# Altium PCB main.PcbDoc
Units mm, origin at the board's own origin, x right, y up, seen from the top; angles counter-clockwise.
Board outline 57.39 x 57.39 mm, 2 copper layers (Top Layer, Bottom Layer); 78 components, 85 nets, 345 pads, 151 vias.
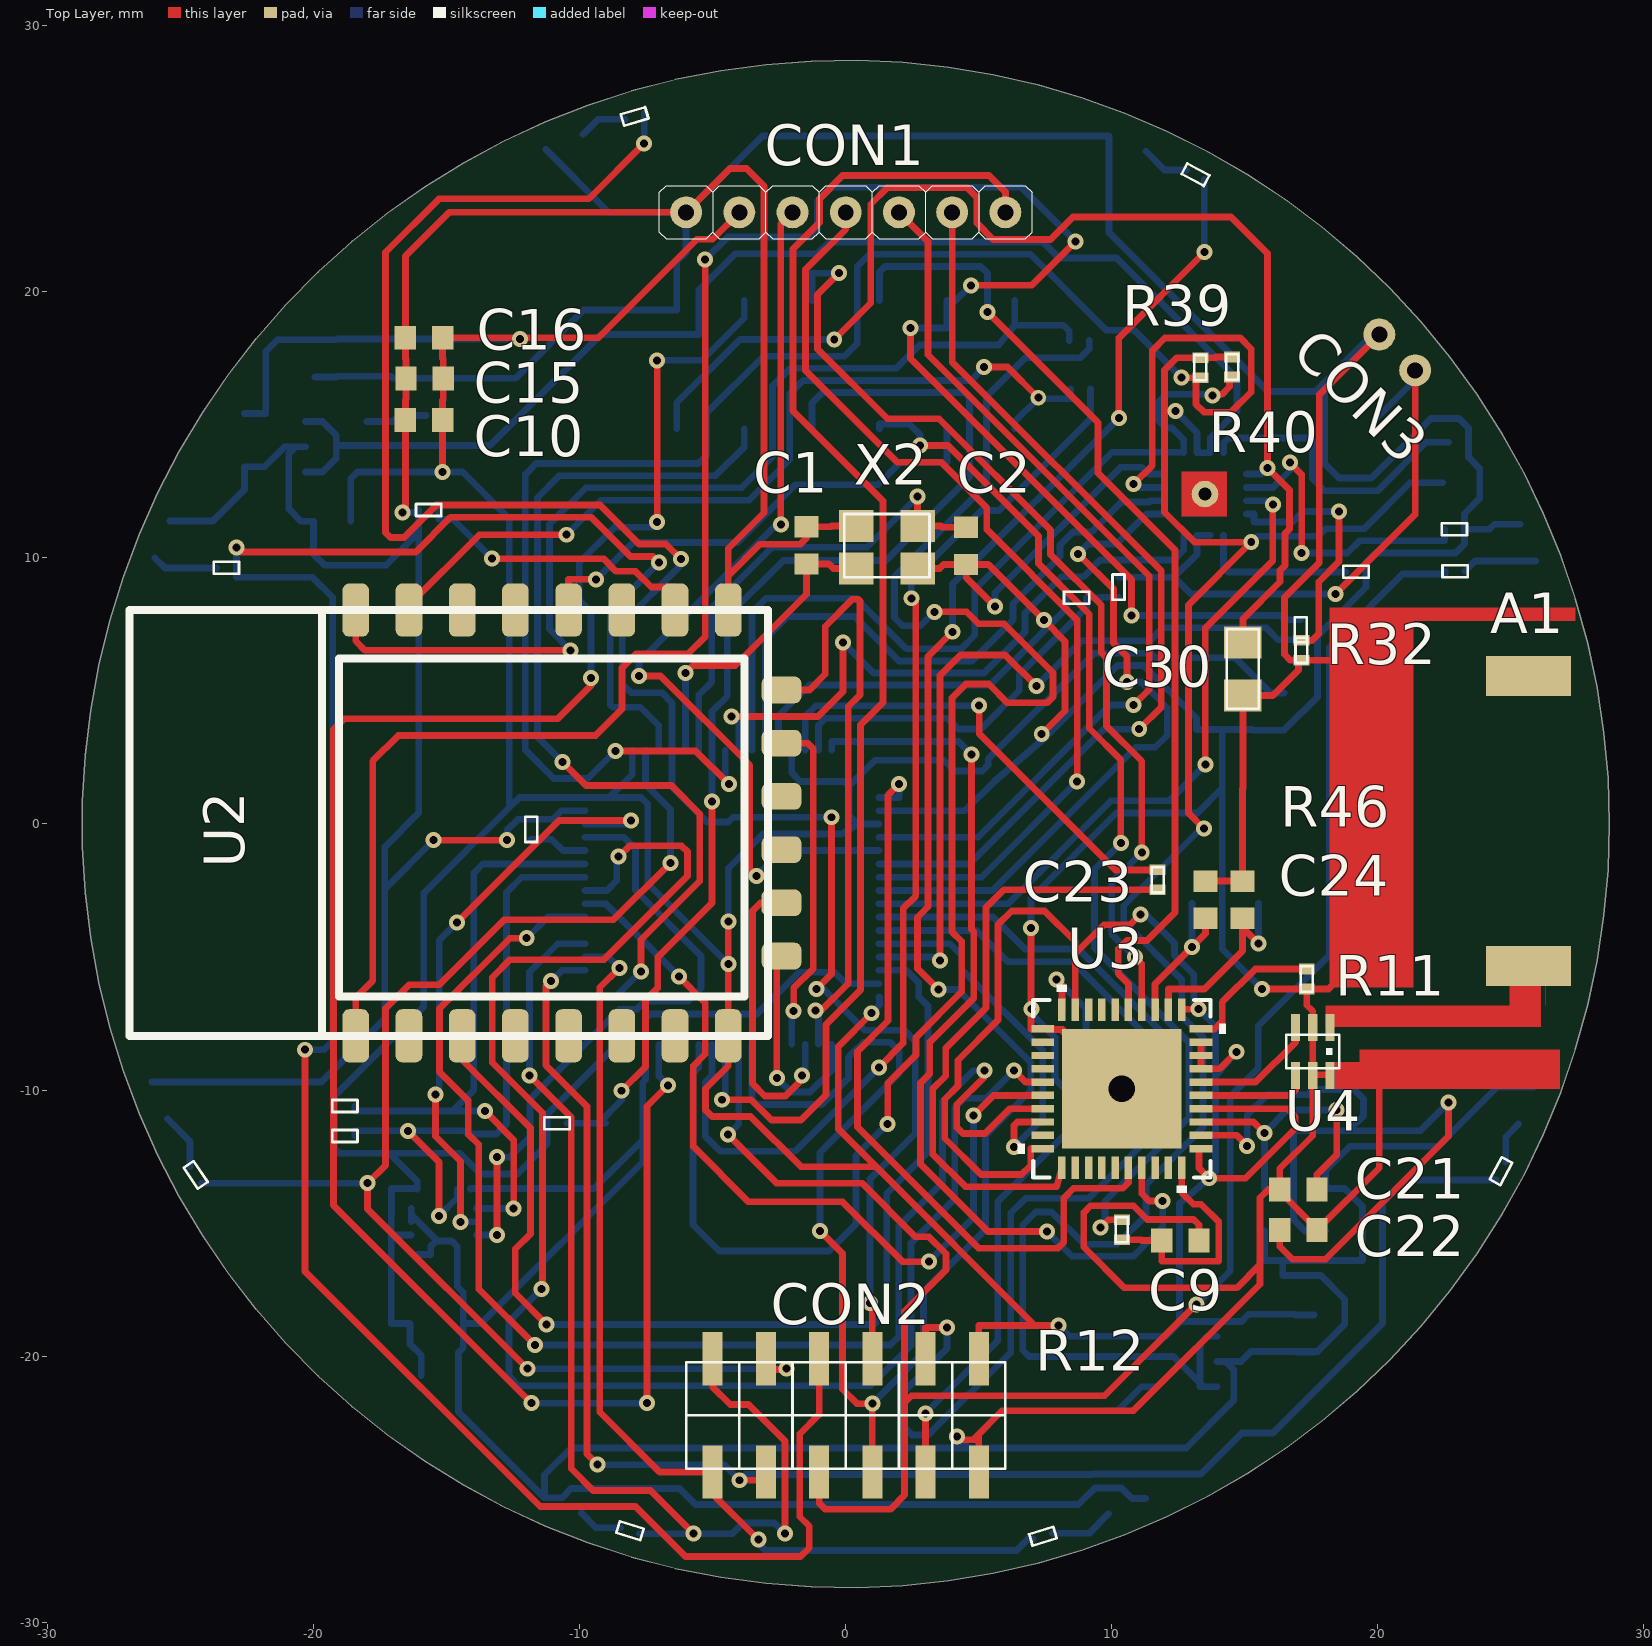
[diagram p0: Top Layer view]
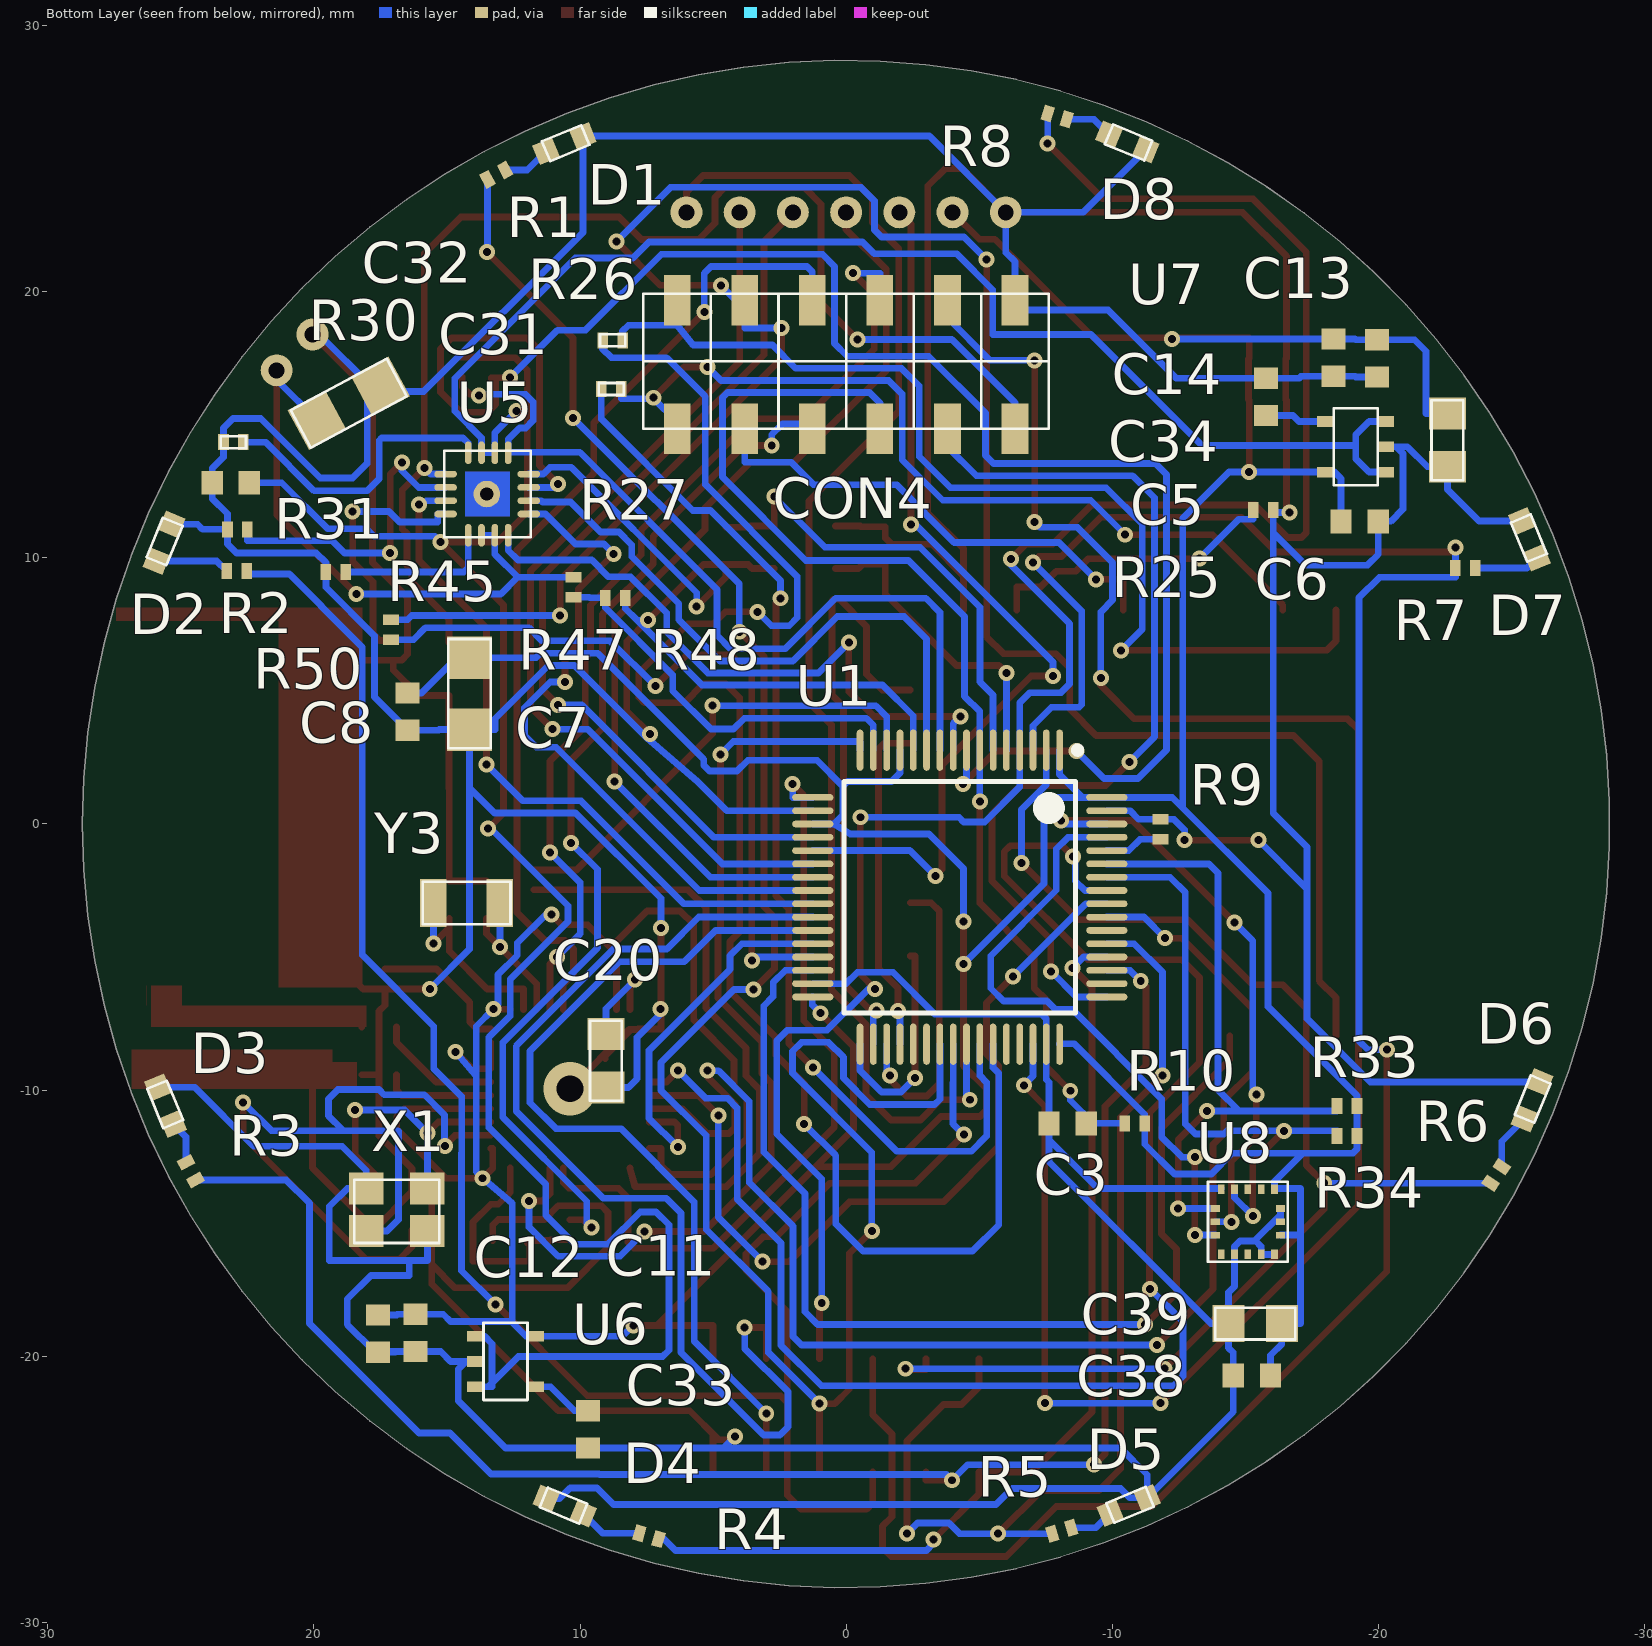
[diagram p1: Bottom Layer view, seen from below]

## Layer stack, top to bottom
Top Solder: solder mask 0.0102, Solder Resist, Dk 3.5
Top Layer: signal copper 0.0356
Dielectric 1: dielectric 0.32, FR-4, Dk 4.8
Bottom Layer: signal copper 0.0356
Bottom Solder: solder mask 0.0102, Solder Resist, Dk 3.5

## Board outline
28.7,0 28.649,1.716 28.495,3.427 28.239,5.125 27.882,6.804 27.425,8.459 26.87,10.084 26.219,11.673 25.474,13.22 24.637,14.72 23.713,16.167 22.704,17.556 21.613,18.883 20.445,20.142 19.204,21.328 17.894,22.439 16.52,23.469 15.087,24.415 13.6,25.273 12.064,26.041 10.485,26.716 8.869,27.295 7.221,27.777 5.546,28.159 3.852,28.44 2.145,28.62 0.429,28.697 -1.288,28.671 -3,28.543 -4.702,28.312 -6.386,27.98 -8.048,27.548 -9.681,27.018 -11.28,26.39 -12.838,25.669 -14.35,24.855 -15.811,23.952 -17.215,22.964 -18.557,21.893 -19.833,20.744 -21.039,19.521 -22.168,18.228 -23.219,16.869 -24.186,15.451 -25.067,13.977 -25.858,12.452 -26.556,10.884 -27.16,9.276 -27.666,7.635 -28.073,5.967 -28.379,4.278 -28.584,2.573 -28.687,0.859 -28.687,-0.859 -28.584,-2.573 -28.379,-4.278 -28.073,-5.967 -27.666,-7.635 -27.16,-9.276 -26.556,-10.884 -25.858,-12.452 -25.067,-13.977 -24.186,-15.451 -23.219,-16.869 -22.168,-18.228 -21.039,-19.521 -19.833,-20.744 -18.557,-21.893 -17.215,-22.964 -15.811,-23.952 -14.35,-24.855 -12.838,-25.669 -11.28,-26.39 -9.681,-27.018 -8.048,-27.548 -6.386,-27.98 -4.702,-28.312 -3,-28.543 -1.288,-28.671 0.429,-28.697 2.145,-28.62 3.852,-28.44 5.546,-28.159 7.221,-27.777 8.869,-27.295 10.485,-26.716 12.064,-26.041 13.6,-25.273 15.087,-24.415 16.52,-23.469 17.894,-22.439 19.204,-21.328 20.445,-20.142 21.613,-18.883 22.704,-17.556 23.713,-16.167 24.637,-14.72 25.474,-13.22 26.219,-11.673 26.87,-10.084 27.425,-8.459 27.882,-6.804 28.239,-5.125 28.495,-3.427 28.649,-1.716

## Design rules (kind name [scope] priority, off if disabled: settings)
Clearance Clearance_1 [All] p1: gap=0.2
Clearance Clearance_Mech13 [OnLayer('Mechanical 13') vs OnLayer('Mechanical 13')] p2: gap=0.03
Clearance Clearance_Mech1 [OnLayer('Mechanical 1') vs OnLayer('Mechanical 1')] p3: gap=0.03
PolygonConnect [All] p1: connectstyle=Relief reliefconductorwidth=0.254 reliefentries=4 polygonreliefangle="90 Angle" airgapwidth=0.254
RoutingVias [All] p1: holewidth=0.3 width=0.6 viastyle="Through Hole" minholewidth=0.3 minwidth=0.6 maxholewidth=0.3 maxwidth=0.6
SolderMaskExpansion [All] p1: expansion=0.102
Width [All] p1: maxlimit=0.254 minlimit=0.254 preferedwidth=0.254
29 further rules are at their usual default settings.

## Components (designator, comment, footprint, x,y, rotation, side; value= is the part's Value field where it differs from the comment)
A1 "ANTENNA" ANTENNA 25.654,-5.334 r90 top
C1 "Cap Semi" 1608[0603] -1.475,10.475 r90 top
C2 "Cap Semi" 1608[0603] 4.525,10.45 r90 top
C3 "Cap Semi" 1608[0603] -8.325,-11.25 r180 bottom
C5 "Cap Semi" CAP_0805 -22.6,13.425 r90 bottom
C6 "Cap Semi" 1608[0603] -19.3,11.375 r0 bottom
C7 "Cap Semi" CAP_1206 14.15,3.55 r90 bottom
C8 "Cap Semi" 1608[0603] 16.475,4.225 r90 bottom
C9 "Cap Semi" 1608[0603] 12.575,-15.65 r180 top
C10 "Cap Semi" 1608[0603] -15.85,15.175 r0 top
C11 "Cap Semi" 1608[0603] 16.175,-19.125 r90 bottom
C12 "Cap Semi" 1608[0603] 17.6,-19.15 r90 bottom
C13 "Cap Semi" 1608[0603] -19.95,17.5 r90 bottom
C14 "Cap Semi" 1608[0603] -18.325,17.525 r90 bottom
C15 "Cap Semi" 1608[0603] -15.825,16.75 r0 top
C16 "Cap Semi" 1608[0603] -15.85,18.275 r0 top
C20 "Cap Semi" CAP_0805 9.025,-9.9 r90 bottom
C21 "Cap Semi" 1608[0603] 17.011,-13.736 r180 top
C22 "Cap Semi" 1608[0603] 17.011,-15.26 r180 top
C23 "Cap Semi" 1608[0603] 13.517,-2.847 r270 top
C24 "Cap Semi" 1608[0603] 14.914,-2.847 r270 top
C30 "Cap Semi" CAP_0805 14.925,6.825 r270 top
C31 "Cap Semi" CAP_1206 17.5,16.45 r331.88 bottom
C32 "Cap Semi" 1608[0603] 23.125,12.825 r180 bottom
C33 "Cap Semi" 1608[0603] 9.7,-22.75 r90 bottom
C34 "Cap Semi" 1608[0603] -15.775,16.05 r270 bottom
C38 "Cap Semi" 1608[0603] -15.25,-20.725 r180 bottom
C39 "Cap Semi" CAP_0805 -14.375,-18.775 r180 bottom
CON1 "OLED" OLED_SNMALL 0,22.987 r180 top locked
CON2 "PIPE" PIPE_top_only 6,-24.225 r180 top
CON3 "Batterey" Batterey 21.4,17.05 r135 top
CON4 "EXT_PIPE" DEBUG_PIPE_TOP_ONLY -6.35,14.85 r0 bottom
D1 "LED2" LED0603 11.43,25.654 r157.5 bottom locked
D2 "LED2" LED0603 26.289,10.033 r112.5 bottom locked
D3 "LED2" LED0603 25.654,-11.43 r67.5 bottom locked
D4 "LED2" LED0603 10.033,-26.289 r22.5 bottom locked
D5 "LED2" LED0603 -9.779,-25.527 r157.5 bottom locked
D6 "LED2" LED0603 -25.125,-10.925 r112.5 bottom
D7 "LED2" LED0603 -25.6,9.85 r67.5 bottom
D8 "LED2" LED0603 -10.033,26.289 r202.5 bottom locked
R1 "Res3" RES_0402#1 13.475,24.225 r331.88 bottom
R2 "Res3" RES_0402#1 22.525,9.5 r180 bottom
R3 "Res3" RES_0402#1 24.45,-13.375 r241.88 bottom
R4 "Res3" RES_0402#1 7.05,-26.875 r196.88 bottom
R5 "Res3" RES_0402#1 -7.747,-26.67 r343.12 bottom
R6 "Res3" RES_0402#1 -24.225,-13.5 r303.75 bottom
R7 "Res3" RES_0402#1 -22.9,9.625 r0 bottom
R8 "Res3" RES_0402#1 -7.575,26.7 r16.88 bottom
R9 "Res3" RES_0402#1 -11.825,-0.575 r270 bottom
R10 "Res3" RES_0402#1 -10.475,-11.25 r0 bottom
R11 "Res3" RES_0402#2 17.325,-5.45 r270 top
R12 "Res3" RES_0402#2 10.375,-15.625 r90 top
R25 "Res3" RES_0402#1 -15.3,11.8 r0 bottom
R26 "Res3" RES_0402#2 8.4,18.175 r0 bottom
R27 "Res3" RES_0402#2 8.45,16.35 r0 bottom
R30 "Res3" RES_0402#2 22.65,14.35 r0 bottom
R31 "Res3" RES_0402#1 22.5,11.075 r180 bottom
R32 "Res3" RES_0402#2 17.125,6.9 r270 top
R33 "Res3" RES_0402#1 -19.2,-10.6 r180 bottom
R34 "Res3" RES_0402#1 -19.2,-11.725 r180 bottom
R39 "Res3" RES_0402#2 13.325,16.775 r90 top
R40 "Res3" RES_0402#2 14.525,16.8 r90 top
R45 "Res3" RES_0402#1 18.8,9.475 r180 bottom
R46 "Res3" RES_0402#2 11.725,-1.725 r270 top
R47 "Res3" RES_0402#1 10.25,8.525 r270 bottom
R48 "Res3" RES_0402#1 9.05,8.5 r0 bottom
R50 "Res3" RES_0402#1 17.1,6.925 r270 bottom
U1 "STM32F103RGT6" LQFP64_L -4.275,-2.75 r270 bottom
U2 "ESP8266-12Q" ESP8266-12Q -18.415,-8.001 r90 top locked
U3 "CC2541F256" RHA40_4P5X4P5 10.375,-9.95 r0 top
U4 "2450BM15A0002E" 2450BM15A0002E 17.55,-8.55 r0 top
U5 "BQ24072RGTT" VQFN16 15.1,10.775 r90 bottom
U6 "LDS3985M33R" SOT23-5L 13.95,-19.25 r180 bottom
U7 "LDS3985M33R" SOT23-5L -20.3,13.225 r0 bottom
U8 "LIS3DHTR" LGA16 -16.6,-13.45 r270 bottom
X1 "XTAL" XTAL 16.884,-14.498 r0 bottom
X2 "XTAL" XTAL 1.55,10.4 r0 top
Y3 "XTAL" QUARZ32768 13.009,-2.974 r0 bottom

## Footprints (in the part's own frame and the unit in brackets; to place one, negate y for a bottom-side part, rotate by r counter-clockwise, add the part's x,y. Pads: shape width x height; smd on the part's side, far side on the other; paste and mask are expansions set on the pad)
1608[0603] [mm] "Chip Capacitor, Body 1.6x0.8mm, IPC High Density"
  rect 0.8x0.9 smd: 1(-0.7,0) 2(0.7,0)
  body extent -0.87,-0.48 0.87,0.48, height 1.3
2450BM15A0002E [mm]
  rect 0.35x1 smd: 1(0.65,0.9) 2(0,0.9) 3(-0.65,0.9) 4(-0.65,-0.9) 5(0,-0.9) 6(0.65,-0.9)
  silkscreen extent -1,-0.62 1,0.62
ANTENNA [mm]
  rect 1.5x3.2 smd: 1(0,0) 2(10.9,0)
Batterey [mm]
  round 1.2 hole 0.6: 1(0,0) 2(1.905,0)
CAP_0805 [mm]
  rect 1.2x1.4 smd: 1(0,0) 2(2,0)
  silkscreen extent -0.5,-0.6 2.5,0.6
CAP_1206 [mm]
  rect 1.6x1.7 smd: 1(0,0) 2(2.7,0)
  silkscreen extent -0.7,-0.8 3.4,0.8
DEBUG_PIPE_TOP_ONLY [mm]
  rect 1x1.9 smd: 1(0,0) 2(2.54,0) 3(5.08,0) 4(7.62,0) 5(10.16,0) 6(12.7,0) 7(12.7,-4.826) 8(10.16,-4.826) 9(7.62,-4.826) 10(5.08,-4.826) 11(2.54,-4.826) 12(0,-4.826)
  silkscreen extent -1.27,-5.08 13.97,0
ESP8266-12Q [mm]
  rrect50% 2x1 smd: 1(0.039,0) 2(0.039,-2) 3(0.039,-4) 4(0.039,-6) 5(0.039,-8) 6(0.039,-10) 7(0.039,-12) 8(0.039,-14) 15(16.039,-14) 16(16.039,-12) 17(16.039,-10) 18(16.039,-8) 19(16.039,-6) 20(16.039,-4) 21(16.039,-2) 22(16.039,0)
  rrect50% 1x1.5 smd: 9(3.039,-16) 10(5.039,-16) 11(7.039,-16) 12(9.039,-16) 13(11.039,-16) 14(13.039,-16)
  silkscreen extent 0.04,-15.5 16.04,8.5
LED0603 [mm]
  rect 0.8x0.8 smd: 1(0,-0.4) 2(1.5,-0.4)
  silkscreen extent 0,-0.8 1.6,0
LGA16 [mm]
  rect 0.35x0.25 smd: 1(0.275,-0.5) 2(0.275,-1) 3(0.275,-1.5) 4(0.275,-2) 5(0.275,-2.5) 9(2.725,-2.5) 10(2.725,-2) 11(2.725,-1.5) 12(2.725,-1) 13(2.725,-0.5)
  rect 0.25x0.35 smd: 6(1,-2.725) 7(1.5,-2.725) 8(2,-2.725) 14(2,-0.275) 15(1.5,-0.275) 16(1,-0.275)
  silkscreen extent 0,-3 3,0
LQFP64_L [mm] "Thin QFP, 64-Leads, Body 10x10mm, Pitch 0.5mm, IPC High Density"
  oval 1.55x0.25 smd: 1(-5.525,3.75) 2(-5.525,3.25) 3(-5.525,2.75) 4(-5.525,2.25) 5(-5.525,1.75) 6(-5.525,1.25) 7(-5.525,0.75) 8(-5.525,0.25) 9(-5.525,-0.25) 10(-5.525,-0.75) 11(-5.525,-1.25) 12(-5.525,-1.75) 13(-5.525,-2.25) 14(-5.525,-2.75) 15(-5.525,-3.25) 16(-5.525,-3.75) 33(5.525,-3.75) 34(5.525,-3.25) 35(5.525,-2.75) 36(5.525,-2.25) 37(5.525,-1.75) 38(5.525,-1.25) 39(5.525,-0.75) 40(5.525,-0.25) 41(5.525,0.25) 42(5.525,0.75) 43(5.525,1.25) 44(5.525,1.75) 45(5.525,2.25) 46(5.525,2.75) 47(5.525,3.25) 48(5.525,3.75)
  oval 0.25x1.55 smd: 17(-3.75,-5.525) 18(-3.25,-5.525) 19(-2.75,-5.525) 20(-2.25,-5.525) 21(-1.75,-5.525) 22(-1.25,-5.525) 23(-0.75,-5.525) 24(-0.25,-5.525) 25(0.25,-5.525) 26(0.75,-5.525) 27(1.25,-5.525) 28(1.75,-5.525) 29(2.25,-5.525) 30(2.75,-5.525) 31(3.25,-5.525) 32(3.75,-5.525) 49(3.75,5.525) 50(3.25,5.525) 51(2.75,5.525) 52(2.25,5.525) 53(1.75,5.525) 54(1.25,5.525) 55(0.75,5.525) 56(0.25,5.525) 57(-0.25,5.525) 58(-0.75,5.525) 59(-1.25,5.525) 60(-1.75,5.525) 61(-2.25,5.525) 62(-2.75,5.525) 63(-3.25,5.525) 64(-3.75,5.525)
  silkscreen extent -5.65,-4.35 4.35,4.55, body extent -5,-5 5,5, height 1.6
OLED_SNMALL [mm]
  round 1.2 hole 0.6: 1(-6,0) 2(-4,0) 3(-2,0) 4(0,0) 5(2,0) 6(4,0) 7(6,0)
  silkscreen extent -7,-1 7,1
PIPE_top_only [mm]
  rect 0.75x2 smd: 1(1,0.125) 2(3,0.125) 3(5,0.125) 4(7,0.125) 5(9,0.125) 6(11,0.125) 7(11,-4.125) 8(9,-4.125) 9(7,-4.125) 10(5,-4.125) 11(3,-4.125) 12(1,-4.125)
  silkscreen extent 0,-4 12,0
QUARZ32768 [mm]
  rect 1x1.8 smd: 1(0,0) 2(2.5,0)
  silkscreen extent -0.4,-0.8 2.9,0.8
RES_0402#1 [mm]
  rect 0.4x0.6 smd: 1(0,0) 2(-0.75,0)
RES_0402#2 [mm]
  rect 0.4x0.6 smd: 1(0,0) 2(0.75,0)
  silkscreen extent -0.1,-0.23 0.85,0.23
RHA40_4P5X4P5 [mm] "CC2541 footprint"
  rect 0.85x0.28 smd paste-0.14: 1(-2.975,2.25) 2(-2.975,1.75) 3(-2.975,1.25) 4(-2.975,0.75) 5(-2.975,0.25) 6(-2.975,-0.25) 7(-2.975,-0.75) 8(-2.975,-1.25) 9(-2.975,-1.75) 10(-2.975,-2.25) 21(2.975,-2.25) 22(2.975,-1.75) 23(2.975,-1.25) 24(2.975,-0.75) 25(2.975,-0.25) 26(2.975,0.25) 27(2.975,0.75) 28(2.975,1.25) 29(2.975,1.75) 30(2.975,2.25)
  rect 0.28x0.85 smd paste-0.14: 11(-2.251,-2.975) 12(-1.75,-2.975) 13(-1.25,-2.975) 14(-0.75,-2.975) 15(-0.25,-2.975) 16(0.25,-2.975) 17(0.75,-2.975) 18(1.25,-2.975) 19(1.75,-2.975) 20(2.251,-2.975) 31(2.251,2.975) 32(1.75,2.975) 33(1.25,2.975) 34(0.75,2.975) 35(0.25,2.975) 36(-0.25,2.975) 37(-0.75,2.975) 38(-1.25,2.975) 39(-1.75,2.975) 40(-2.251,2.975)
  rect 4.5x4.5 smd paste-2.237 mask-2.235: 41(0,0)
  silkscreen extent -3.91,-3.91 3.91,3.91
SOT23-5L [mm]
  rect 0.6x0.4 smd: 1(0,0) 2(0,-0.95) 3(0,-1.9) 4(2.3,-1.9) 5(2.3,0)
  silkscreen extent 0.32,-2.4 1.98,0.5
VQFN16 [mm]
  oval 0.85x0.25 smd: 1(0.075,-0.9) 2(0.075,-1.4) 3(0.075,-1.9) 4(0.075,-2.4) 9(3.175,-2.4) 10(3.175,-1.9) 11(3.175,-1.4) 12(3.175,-0.9)
  oval 0.25x0.85 smd: 5(0.875,-3.175) 6(1.375,-3.175) 7(1.875,-3.175) 8(2.375,-3.175) 13(2.375,-0.05) 14(1.875,-0.05) 15(1.375,-0.05) 16(0.875,-0.05)
  round 1 hole 0.5: ""(1.625,-1.6)
  Multi-Layer region: 0.775,-0.776 2.475,-0.776 2.475,-2.476 0.775,-2.476
  silkscreen extent 0,-3.25 3.25,0
XTAL [mm]
  rect 1.3x1.2 smd: 1(-1.15,-0.8) 2(1.15,-0.8) 3(1.15,0.8) 4(-1.15,0.8)
  silkscreen extent -1.6,-1.13 1.6,1.25

## Part data
C1 C2 C3 C5 C6 C7 C8 C9 C10 C11 C12 C13 C14 C15 C16 C20 C21 C22 C23 C24 C30 C31 C32 C33 C34 C38 C39: "Capacitor (Semiconductor SIM Model)"
D1 D2 D3 D4 D5 D6 D7 D8: "Typical RED, GREEN, YELLOW, AMBER GaAs LED"
R1 R2 R3 R4 R5 R6 R7 R8 R9 R10 R11 R12 R25 R26 R27 R30 R31 R32 R33 R34 R39 R40 R45 R46 R47 R48 R50: "Resistor"
U1: "STM32 ARM-based 32-bit MCU Performance Line with 1024 kB Flash, 96 kB Internal RAM, -40 to +85°C Temperature, 64-Pin LQFP, Tray"
Y3: "Crystal Oscillator"

## Via types
v1: diameter 0.6, hole 0.3, Top Layer to Bottom Layer, 150 vias
v2: diameter 2, hole 1, Top Layer to Bottom Layer, 1 vias

## Nets (pads, with @x,y where several pads share a name; then routed paths per layer and width w, separated by ;. In a path a pad name is that pad's centre, name@x,y a point inside that pad or via, vN(x,y) a via of type N, cw(c..) or ccw(c..) an arc to the next point about the centre after c; other vN are vias at no path point)
+3V: C5.2 C6.2 C7.2 C8.2 C10.2 C11.2 C12.2 C13.2 C14.2 C15.2 C16.2 C38.2 C39.2 CON1.6 CON2.12 R10.2 R33.1 R34.1 U1.1 U1.13 U1.19 U1.32 U1.48 U1.64 U2.8 U3.10 U3.21 U3.24 U3.27 U3.28 U3.29 U3.31 U3.39 U6.5 U7.5 U8.1 U8.14 | length 239.2
  Top Layer w0.254: v1(-15.15,13.225) C10.2 -15.15,15.926 -15.125,15.951 C15.2 -15.125,17.475 -15.15,17.5 C16.2 v1@-12.292,18.275 ; v1(-12.242,18.225) v1@-12.292,18.275 ; v1(-4.415,-3.67) v1(-4.415,-5.262) U2.8 -4.415,-9.089 -5.275,-9.949 -5.275,-10.744 -5.029,-10.99 -3.572,-10.99 -1.684,-12.878 1.133,-12.878 ; CON1.6 -5.01,21.977 -5.591,21.977 -9.293,18.275 v1@-12.292,18.275 ; v1(0.965,-7.112) -0.279,-8.357 -0.279,-11.465 1.133,-12.878 ; CON2.12 5,-18.847 7.102,-18.847 ; U3.10 6.952,-12.2 6.952,-12.827 6.604,-13.175 5.083,-13.175 3.72,-11.811 3.72,-10.346 4.216,-9.849 4.216,-8.879 5.723,-7.372 5.723,-3.785 6.239,-3.268 7.477,-3.268 8.625,-4.416 8.625,-4.872 ; v1@7.95,-18.847 7.102,-18.847 ; v1(7.998,-18.847) 7.102,-18.847 ; U3.39 8.625,-4.872 ; v1(11.075,-3.402) 10.69,-3.786 9.71,-3.786 8.625,-4.872 ; U3.31 12.626,-6.96 v1(13.259,-6.96) ; U3.21 13.275,-12.2 13.275,-12.929 v1(13.659,-13.313) 15.031,-13.313 16.891,-11.454 16.891,-10.998 16.593,-10.7 U3.24 ; U3.29 U3.28 U3.27 14.041,-9.2 v1(14.681,-8.56) ; 1.133,-12.878 7.102,-18.847
  Bottom Layer w0.254: C5.2 -21.793,15.425 -21.793,17.768 -21.361,18.2 C13.2 -19.152,18.2 -19.127,18.225 C14.2 v1(-12.242,18.225) ; C6.2 -18.6,12.979 -18.354,13.225 U7.5 v1(-15.15,13.225) -14.393,13.225 -12.649,11.481 -12.649,0.61 ; -17.054,-15.45 U8.14 ; C38.2 -15.95,-19.964 -16.375,-19.539 C39.2 -17.079,-18.775 -17.079,-14.656 -17.075,-14.652 -17.075,-13.7 -16.125,-13.7 U8.1 -16.1,-13.437 -17.167,-12.37 ; U1.48 -8.025,-8.255 -8.567,-8.255 -11.225,-10.913 R10.2 -11.225,-12.034 -12.34,-13.149 -13.733,-13.149 -14.513,-12.37 -17.167,-12.37 ; U1.1 -8.025,1.865 -8.89,1 ; v1(-4.415,-5.262) -7.442,-2.235 -7.442,0.754 -7.688,1 -8.89,1 ; v1(-4.415,-3.67) -4.415,-1.672 -3.116,-0.373 -0.152,-0.373 0.457,0 ; U1.13 -2.025,1.916 -1.709,1.6 -0.05,1.6 0.1,1.45 ; v1(0.965,-7.112) 1.27,-6.807 1.27,-6.5 U1.32 ; U1.19 0.457,0 ; v1(7.998,-18.847) 8.401,-19.25 ; 8.425,-19.25 8.401,-19.25 ; v1(11.075,-3.402) 11.284,-3.402 12.359,-4.477 12.359,-4.935 13.079,-5.655 13.079,-6.78 v1(13.259,-6.96) 13.9,-7.601 13.9,-13.072 v1(13.659,-13.313) 12.548,-14.249 12.548,-18.696 ; 13.93,-9.44 v1(14.681,-8.56) ; C8.2 15.955,4.925 14.63,6.25 C7.2 11.647,6.25 11.482,6.415 9.332,6.415 5.351,2.435 5.351,2.21 5.131,1.989 4.097,1.989 3.691,2.396 1.096,2.396 0.127,1.427 0.127,0.33 0.457,0 ; C12.2 16.891,-18.45 16.866,-18.425 C11.2 15.138,-18.425 14.867,-18.696 12.548,-18.696 ; -17.167,-12.37 -19.048,-12.37 -19.2,-12.217 R34.1 R33.1 -19.2,-10.211 -15.855,-6.866 -15.855,-2.597 -12.649,0.61 ; -12.649,0.61 -12.259,1 U1.64 -8.89,1 ; 8.401,-19.25 U6.5 12.04,-19.25 12.548,-18.742 12.548,-18.696
+5V: C30.1 CON4.1 U5.13 | length 47.6
  Top Layer w0.254: v1(-0.432,18.212) 0.94,19.583 0.94,23.292 1.562,23.914 4.559,23.914 4.927,23.546 4.927,22.581 5.537,21.971 7.696,21.971 8.534,22.809 14.478,22.809 15.85,21.438 v1(15.85,13.386) 16.68,12.556 16.68,11.089 16.504,10.913 16.504,9.715 16.321,9.532 16.321,9.104 14.925,7.708 C30.1
  Bottom Layer w0.254: CON4.1 -6.35,15.835 -3.974,18.212 v1(-0.432,18.212) ; U5.13 15.614,13.15 v1(15.85,13.386)
GND: C1.2 C2.1 C3.1 C5.1 C6.1 C7.1 C8.1 C9.1 C10.1 C11.1 C12.1 C13.1 C14.1 C15.1 C16.1 C20.1 C21.2 C22.1 C23.1 C24.1 C30.2 C31.1 C32.1 C33.1 C34.1 C38.1 C39.1 CON1.7 CON2.1 CON3.2 CON4.12 D1.2 D2.2 D3.2 D4.2 D5.2 D6.2 D7.2 D8.2 R9.2 R11.2 R25.2 R30.2 R31.2 R32.2 R45.2 R48.2 U1.12 U1.18 U1.31 U1.47 U1.63 U2.15 U3.1 U3.41 U4.2 U4.5 U4.6 U5.8 U6.2 U7.2 U8.5 U8.10 U8.12 U8.13 U8.15 U8.16 X1.2 X1.4 X2.2 X2.4 | length 491.3
  Top Layer w0.254: v1(-16.662,11.709) -16.662,11.64 -16.55,11.752 C10.1 -16.55,15.926 -16.525,15.951 C15.1 -16.525,17.475 -16.55,17.5 C16.1 -16.55,21.34 -14.903,22.987 CON1.7 -4.349,24.638 -3.734,24.638 -3.07,23.974 -3.07,11.698 -4.415,10.353 -4.415,9.322 ; v1(-15.494,-0.61) v1(-12.725,-0.61) ; U2.15 -4.415,9.322 ; X2.4 -0.534,11.2 -0.559,11.175 C1.2 -1.475,10.744 -1.704,10.516 -3.221,10.516 -4.415,9.322 ; X2.2 3.531,9.6 3.681,9.75 C2.1 ; v1@4.353,-23.139 5,-23.139 CON2.1 5,-22.991 4.851,-23.139 ; 4.85,-23.075 5.875,-22.05 6.025,-22.05 6.028,-22.047 10.82,-22.047 15.57,-17.297 15.57,-16.561 ; v1(5.613,8.179) 4.525,9.267 C2.1 ; v1@6.844,-7.002 6.895,-6.95 v1(6.975,-6.95) ; v1(6.96,-3.912) 6.96,-7.7 U3.1 ; v1(7.366,3.378) 8.244,4.256 8.244,6.866 v1(7.45,7.66) 5.36,9.75 C2.1 ; U3.1@7.823,-7.7 U3.1@7.823,-7.727 ; 7.954,-7.727 7.849,-7.727 U3.1@7.822,-7.7 ; U3.41@9.048,-8.821 9.048,-8.692 8.083,-7.727 ; v2(10.375,-9.95) 8.152,-7.727 8.083,-7.727 ; C9.1 13.275,-15.062 13.072,-14.859 11.331,-14.859 10.82,-14.348 9.195,-14.348 8.948,-14.595 8.948,-15.908 10.473,-17.432 14.699,-17.432 15.57,-16.561 ; C23.1 C24.1 14.914,1.321 14.925,1.332 C30.2 16.052,4.825 17.018,5.791 R32.2@17.018,6.15 ; v1(15.646,-6.2) R11.2 ; U4.6@18.2,-9.425 U4.5@17.55,-9.425 ; 18.375,-5.975 18.15,-6.2 R11.2 ; 18.5,6.15 R32.2 R32.2@17.018,6.15 ; 20.025,-9.675 20.05,-9.7 20.05,-12.921 C22.1 17.711,-15.215 16.311,-13.815 C21.2 ; CON3.2 17.797,16.141 17.797,9.83 16.485,8.517 16.485,6.379 16.713,6.15 R32.2@17.018,6.15 ; U3.1 U3.1@7.542,-7.7 ; U3.1 U3.1@7.822,-7.7 ; U3.1@7.542,-7.7 U3.1@7.822,-7.7 ; U3.1@7.542,-7.7 7.569,-7.727 U3.1@7.823,-7.727 ; U3.1@7.823,-7.727 8.083,-7.727 ; 15.57,-16.561 15.57,-14.046 15.88,-13.736 C21.2 ; C21.2 16.311,-12.954 17.55,-11.715 U4.5@17.55,-9.425 ; R11.2 17.325,-6.811 17.55,-7.036 U4.5@17.55,-9.425
  Bottom Layer w0.254: D6.2 -19.7,-9.692 -17.323,-7.315 -17.323,-2.438 ; D7.2 -23.784,11.389 -22.6,12.573 C5.1 -21.844,13.425 -21.094,14.175 -20.676,14.175 ; U7.2 -20.676,14.175 ; C13.1 -19.152,16.8 -19.127,16.825 C14.1 -17.094,16.825 -17.019,16.75 C34.1 -12.419,16.75 -9.851,19.318 -6.35,19.318 CON4.12 -6.35,21.133 -6,21.483 CON1.7 ; v1(-16.662,11.709) R25.2@-16.05,11.709 ; U8.15 U8.16 ; -16.262,-14.75 -15.397,-15.616 -15.397,-15.672 ; U8.13 -15.875,-16.175 U8.12 -15.6,-15.875 -15.397,-15.672 ; R25.2 R25.2@-16.05,11.709 ; v1(-15.494,-0.61) -17.323,-2.438 ; U8.5 -14.1,-13.698 -9.457,-13.698 -7.625,-11.866 ; v1(-12.725,-0.61) -12.725,-0.229 -12.322,0.175 R9.2 -10.998,0.175 -10.673,0.5 U1.63 ; D8.2 -8.907,22.987 CON1.7 ; U1.12 -2.525,4.069 -1.372,5.222 5.42,5.222 7.858,7.66 ; U1.31 0.003,-6 -0.427,-5.571 -1.761,-5.571 -3.33,-7.14 -7.343,-7.14 -7.525,-7.322 U1.47 -7.525,-9.604 -7.625,-9.704 C3.1 -7.625,-11.866 ; U1.18 4.488,0.5 5.572,1.584 7.487,3.238 v1@7.497,3.247 ; v1(4.177,-23.012) 4.615,-23.45 ; v1(5.613,8.179) 5.613,8.691 10.325,13.403 11.126,13.403 11.379,13.15 U5.8 ; v1(6.96,-3.912) 6.96,-2.791 10.167,0.415 13.215,0.415 14.15,1.35 ; v1(6.975,-6.95) 6.895,-6.95 6.844,-7.002 7.86,-8.017 7.86,-9.576 8.184,-9.9 C20.1 ; v1(7.366,3.378) v1@7.497,3.247 ; v1(7.45,7.66) 7.858,7.66 ; R48.2 8.3,8.103 7.858,7.66 ; D4.2 10.766,-25.345 10.37,-24.95 9.365,-24.95 8.738,-25.578 -5.639,-25.578 -6.242,-24.975 -10.32,-24.975 -10.668,-25.323 D5.2 ; U6.2 14.275,-20.2 ; v1(15.646,-6.2) 14.15,-4.704 14.15,1.35 ; X1.4 15.734,-16.4 19.425,-16.4 19.425,-14.378 18.745,-13.698 X1.2 18.034,-13.026 18.948,-12.112 22.264,-12.112 24.485,-9.891 D3.2 ; 16.42,-16.4 16.42,-16.967 17.856,-16.967 18.75,-17.861 18.75,-18.804 17.729,-19.825 C11.1 ; C12.1 16.941,-19.85 C11.1 ; CON3.2 19.8,18.397 C31.1@17.825,16.422 ; D2.2 24.372,11.266 24.181,11.075 R31.2 ; -20.676,14.175 -20.93,13.921 -20.93,11.832 -20.472,11.375 C6.1 -20,10.135 -19.594,9.728 -17.269,9.728 -16.05,10.947 ; -17.323,-2.438 -17.323,-0.864 -16.05,0.409 -16.05,10.947 ; -16.05,10.947 R25.2@-16.05,11.709 ; -15.397,-15.672 -14.803,-15.672 -14.6,-15.875 U8.10 -14.6,-17.377 -14.375,-17.602 C39.1 ; C39.1 -13.708,-18.775 -7.625,-12.692 -7.625,-11.866 ; C39.1 -14.375,-19.688 -14.55,-19.863 C38.1 -14.55,-22.09 D5.2 ; D5.2 -11.318,-24.455 -10.312,-23.45 4.615,-23.45 ; CON1.7 -3.129,25.858 D1.2 9.891,22.233 15.874,16.25 17.653,16.25 C31.1@17.825,16.422 ; 4.615,-23.45 C33.1 12.796,-23.45 14.58,-21.666 14.58,-20.505 14.275,-20.2 ; v1@7.497,3.247 10.211,5.961 11.193,5.961 13.181,3.973 13.181,3.55 C7.1 ; 14.15,1.35 C7.1 ; C7.1 15.291,3.55 15.316,3.525 C8.1 17.727,4.777 17.727,7.073 19.55,8.896 R45.2 19.55,9.821 19.915,10.187 22.912,10.187 23.25,10.525 R31.2 ; 14.275,-20.2 14.859,-20.2 15.234,-19.825 C11.1 ; C31.1@17.825,16.422 17.997,16.25 17.997,13.549 18.542,13.004 19.761,13.004 21.997,15.24 23.044,15.24 23.4,14.884 R30.2 23.4,13.785 23.825,13.36 C32.1 23.825,12.234 23.25,11.659 R31.2
NetA1_1: A1.1 U4.1 | length 0.1
  Top Layer w0.254: U4.1@18.2,-7.625 U4.1@18.2,-7.544
NetC1_1: C1.1 U1.5 X2.1 | length 11.8
  Top Layer w0.254: v1(-6.025,5.672) -5.74,5.957 -4.152,5.957 -1.475,8.634 C1.1 -0.635,9.775 -0.46,9.6 X2.1
  Bottom Layer w0.254: U1.5 v1(-6.025,5.672)
NetC2_2: C2.2 U1.6 X2.3 | length 18
  Top Layer w0.254: v1(2.7,12.3) X2.3 3.581,11.2 3.631,11.15 C2.2
  Bottom Layer w0.254: U1.6 -5.525,4.851 -5.032,5.344 -5.032,8.145 -2.778,10.4 0.8,10.4 v1(2.7,12.3)
NetC3_2: C3.2 CON4.3 R10.1 U1.7 | length 45.1
  Top Layer w0.254: v1(-8.425,-10.025) -7.525,-9.125 -7.525,-6.618 -7.069,-6.162 -7.069,-5.012 -5.025,-2.968 v1(-5.025,0.847)
  Bottom Layer w0.254: C3.2 R10.1 -9.294,-11.25 -8.425,-10.381 v1(-8.425,-10.025) ; v1(-5.025,0.847) U1.7 -5.025,4.227 -4.453,4.799 -4.453,7.798 -2.345,9.905 1.515,9.905 4.648,13.038 4.648,16.027 4.458,16.218 -0.876,16.218 -1.27,15.824 CON4.3
NetC9_2: C9.2 R12.1 U3.20 | length 8.9
  Top Layer w0.254: R12.1 11.1,-15.625 11.125,-15.65 C9.2 11.975,-15.75 11.975,-15.7 11.875,-15.8 11.875,-16.434 14.021,-16.434 14.021,-14.959 13.352,-14.29 13.073,-14.29 12.626,-13.843 U3.20
NetC20_2: C20.2 U3.40 | length 3.7
  Top Layer w0.254: v1(7.925,-5.842) 8.124,-6.042 U3.40
  Bottom Layer w0.254: v1(7.925,-5.842) 9.025,-6.942 C20.2
NetC21_1: C21.1 U3.23 X1.1 | length 11.1
  Top Layer w0.254: U3.23 15.328,-11.2 v1(15.734,-11.606) ; C21.1 17.711,-13.175 18.451,-12.435 v1(18.451,-10.75) v1@18.451,-10.625
  Bottom Layer w0.254: X1.1 v1(15.734,-11.606) 16.59,-10.75 v1(18.451,-10.75)
NetC22_2: C22.2 U3.22 X1.3 | length 30.7
  Top Layer w0.254: U3.22 14.697,-11.7 15.088,-12.09 15.078,-12.1 v1(15.075,-12.1) ; C22.2 16.311,-15.875 16.794,-16.358 18.034,-16.358 22.657,-11.735 v1(22.657,-10.465)
  Bottom Layer w0.254: v1(15.075,-12.1) 15.078,-12.1 15.088,-12.09 15.088,-10.938 15.851,-10.175 17.359,-10.175 17.559,-9.975 19.1,-9.975 19.456,-10.331 19.456,-10.969 18.934,-11.491 ; X1.3 17.254,-15.298 16.825,-14.869 16.825,-11.547 16.847,-11.525 21.597,-11.525 v1(22.657,-10.465)
NetC23_2: C23.2 U3.33 Y3.1 | length 5.9
  Top Layer w0.254: U3.33 11.625,-6.014 v1(13.009,-4.63) 13.517,-4.122 C23.2
  Bottom Layer w0.254: v1(13.009,-4.63) 13.009,-4.191 Y3.1
NetC24_2: C24.2 U3.32 Y3.2 | length 7.7
  Top Layer w0.254: U3.32 12.125,-6.198 13.487,-6.198 14.914,-4.771 14.914,-3.947 ; C24.2 14.914,-3.947 ; v1(15.509,-4.496) 14.961,-3.947 14.914,-3.947
  Bottom Layer w0.254: v1(15.509,-4.496) Y3.2
NetC31_2: C31.2 CON3.1 R47.2 U5.2 U5.3 | length 23
  Top Layer w0.254: v1(18.408,8.641) 21.4,11.633 CON3.1
  Bottom Layer w0.254: R47.2 12.34,9.275 ; U5.2 U5.3 13.2,10.135 12.34,9.275 ; v1(18.408,8.641) 12.974,8.641 12.34,9.275 ; C31.2 21.4,16.696 CON3.1
NetC32_2: C32.2 R39.2 R40.2 U5.10 U5.11 U6.1 U6.3 U7.1 U7.3 | length 120.5
  Top Layer w0.254: v1(12.387,15.519) 11.982,15.519 ; v1(13.462,-0.178) 12.878,0.406 12.878,8.23 v1(15.24,10.592) 13.105,10.592 11.982,11.715 11.982,15.519 ; R40.2 13.919,17.55 13.894,17.525 R39.2 12.446,17.525 11.982,17.061 11.982,15.519
  Bottom Layer w0.254: U7.1 -19.66,13.225 -19.152,13.733 -19.152,14.224 ; U7.3 -19.66,15.125 -19.152,14.617 -19.152,14.224 ; v1(12.387,15.519) 13.2,14.707 U5.10 13.437,13.95 U5.11 13.7,14.513 14.707,15.519 14.707,16.739 10.177,21.268 8.009,21.268 7.407,21.869 -0.619,21.869 -1.056,21.433 -4.145,21.433 -5.512,20.066 -5.512,18.399 -9.201,18.399 -13.376,14.224 -19.152,14.224 ; v1(13.462,-0.178) 13.343,-0.178 10.448,-3.073 10.448,-3.666 12.625,-5.843 12.625,-7.213 13.425,-8.013 13.425,-11.407 11.286,-13.546 11.286,-14.708 10.203,-15.791 8.949,-15.791 7.736,-14.579 7.14,-14.579 6.656,-15.062 6.656,-19.776 6.895,-20.015 12.319,-20.015 13.31,-21.006 ; U6.3 13.454,-21.15 ; U6.1 13.592,-19.25 13.31,-19.533 13.31,-21.006 ; v1(15.24,10.592) 15.465,10.816 17.751,10.816 18.029,11.095 19.479,11.095 21.209,12.825 C32.2 ; 13.31,-21.006 13.31,-21.15 13.454,-21.15 ; 13.31,-21.006 13.454,-21.15
NetC33_2: C33.2 U6.4 | length 2.3
  Bottom Layer w0.254: C33.2 10.211,-22.05 11.111,-21.15 U6.4
NetC34_2: C34.2 U7.4 | length 2.3
  Bottom Layer w0.254: U7.4 -17.018,15.125 -16.793,15.35 C34.2
NetCON1_1: CON1.1 U1.41 | length 51.5
  Top Layer w0.254: v1(-4.648,-10.363) -3.557,-10.363 -2.795,-11.125 -1.684,-11.125 -0.744,-10.185 -0.744,-7.537 0.553,-6.24 0.553,3.728 1.397,4.572 1.397,12.141 -1.981,15.519 -1.981,21.614 -0.991,22.605 -0.991,23.495 -0.118,24.368 5.381,24.368 6,23.749 CON1.1
  Bottom Layer w0.254: v1(-4.648,-10.363) -4.525,-10.24 U1.41
NetCON1_2: CON1.2 U1.22 | length 34.9
  Top Layer w0.254: CON1.2 4,17.366 11.862,9.504 11.862,4.394 v1(11.03,3.562)
  Bottom Layer w0.254: U1.22 4.65,-1.5 9.712,3.562 v1(11.03,3.562)
NetCON1_3: CON1.3 U1.20 | length 34.3
  Top Layer w0.254: CON1.3 3.088,21.899 3.088,17.636 11.406,9.318 11.406,5.056 v1(10.82,4.47)
  Bottom Layer w0.254: U1.20 4.96,-0.5 9.931,4.47 v1(10.82,4.47)
NetCON1_4: CON1.4 U1.23 | length 36.1
  Top Layer w0.254: CON1.4 0,22.348 -1.513,20.835 -1.513,17.043 1.934,13.597 3.582,13.597 5.302,11.877 5.302,11.062 8.698,7.666 v1(8.698,1.597)
  Bottom Layer w0.254: U1.23 5.101,-2 v1(8.698,1.597)
NetCON1_5: CON1.5 U1.21 | length 34.7
  Top Layer w0.254: v1(-7.772,5.563) -6.96,5.563 -3.607,2.21 -3.607,-1.702 v1(-3.353,-1.956) ; v1(-2.438,11.252) -2.438,22.549 CON1.5
  Bottom Layer w0.254: v1(-7.772,5.563) -7.772,6.088 -2.608,11.252 v1(-2.438,11.252) ; v1(-3.353,-1.956) -2.397,-1 U1.21
NetCON2_2: CON2.2 U1.27 | length 33.4
  Top Layer w0.254: CON2.2 v1(3,-22.146)
  Bottom Layer w0.254: U1.27 4.907,-4 6.079,-5.173 8.514,-5.173 11.875,-8.533 11.875,-10.475 10.9,-11.45 8.459,-11.45 5.709,-14.2 5.709,-19.437 v1(3,-22.146)
NetCON2_3: CON2.3 R1.1 U1.39 | length 82.6
  Top Layer w0.254: v1(-0.965,-15.291) -0.119,-16.137 -0.119,-21.242 0.422,-21.784 v1(1,-21.784) CON2.3 ; v1(3.48,-6.223) 2.692,-5.436 2.692,-3.505 3.088,-3.11 3.088,6.299 v1(4.013,7.225) ; v1(10.262,15.265) 10.262,18.263 v1(13.487,21.488)
  Bottom Layer w0.254: U1.39 -3.525,-10.343 -3.327,-10.541 -0.889,-10.541 0.102,-9.55 0.102,-8.763 0.66,-8.204 1.676,-8.204 2.013,-8.541 2.013,-9.365 -0.965,-12.343 v1(-0.965,-15.291) ; v1(1,-21.784) 2.921,-19.863 2.921,-17.577 5.255,-15.243 5.255,-11.709 6.952,-10.012 6.952,-8.966 4.208,-6.223 v1(3.48,-6.223) ; v1(4.013,7.225) 4.013,9.017 v1(10.262,15.265) ; R1.1 13.475,21.501 v1(13.487,21.488)
NetCON2_4: CON2.4 R2.1 U1.40 | length 72.9
  Top Layer w0.254: v1(-4.428,-11.676) -2.607,-13.497 0.608,-13.497 2.626,-15.515 3.128,-15.515 3.763,-16.15 3.763,-16.76 2.21,-18.313 2.21,-21.742 ; CON2.4 -1,-25.518 -0.762,-25.756 1.676,-25.756 2.21,-25.222 2.21,-21.742 ; v1(13.183,-18.059) 13.157,-18.059 9.728,-21.488 2.464,-21.488 2.21,-21.742
  Bottom Layer w0.254: v1(-4.428,-11.676) -4.021,-11.27 -4.021,-9.72 -4.025,-9.716 U1.40 ; v1(13.183,-18.059) 14.453,-16.789 14.453,-12.364 14.448,-12.36 14.448,-10.241 15.5,-9.189 15.5,-7.6 18.181,-4.919 18.181,6.631 19.719,8.169 19.719,8.194 20.923,9.398 22.525,9.398 R2.1
NetCON2_5: CON2.5 R3.1 U1.51 | length 63.1
  Top Layer w0.254: v1(-11.074,-5.906) -11.27,-6.102 -11.27,-9.069 -9.728,-10.61 -9.728,-23.673 v1(-9.322,-24.079) ; v1(-3.988,-24.663) -3,-24.663 CON2.5
  Bottom Layer w0.254: v1(-11.074,-5.906) -10.668,-5.5 U1.51 ; v1(-9.322,-24.079) -4.572,-24.079 v1(-3.988,-24.663) -3.774,-24.45 9.272,-24.45 9.297,-24.425 13.345,-24.425 14.884,-22.885 16.053,-22.885 20.168,-18.771 20.168,-14.249 21.042,-13.375 R3.1
NetCON2_6: CON2.6 R4.1 U1.52 | length 37.7
  Top Layer w0.254: v1(-8.509,-5.41) -9.246,-6.147 -9.246,-22.098 -6.994,-24.35 CON2.6 -5,-25.175 v1(-3.277,-26.899)
  Bottom Layer w0.254: U1.52 -8.919,-5 v1(-8.509,-5.41) ; v1(-3.277,-26.899) -3.277,-27.051 -3.023,-27.305 6.413,-27.305 6.843,-26.875 R4.1
NetCON2_7: CON2.7 R5.1 U1.53 | length 41.3
  Top Layer w0.254: v1(-11.887,-9.449) -10.312,-11.024 -10.312,-24.232 -9.5,-25.044 -7.341,-25.044 v1(-5.715,-26.67) ; CON2.7 -5,-21.158 -4.34,-21.819 -3.658,-21.819 -2.286,-23.19 v1(-2.286,-26.67)
  Bottom Layer w0.254: v1(-11.887,-9.449) -11.887,-5.563 -10.825,-4.5 U1.53 ; R5.1 v1(-5.715,-26.67) -4.259,-26.67 -3.861,-26.272 -2.684,-26.272 v1(-2.286,-26.67)
NetCON2_8: CON2.8 R6.1 U1.2 | length 51.1
  Top Layer w0.254: v1(-11.963,-20.472) -17.971,-14.465 v1(-17.971,-13.5) -17.297,-12.827 -17.297,-6.934 -16.4,-6.037 -15.273,-6.037 -12.832,-3.596 -8.726,-3.596 v1(-6.591,-1.46) ; CON2.8 -3,-20.498 -2.261,-20.498 v1(-2.235,-20.472)
  Bottom Layer w0.254: R6.1 v1(-17.971,-13.5) ; v1(-11.963,-20.472) v1(-2.235,-20.472) ; U1.2 -7.525,1.483 -6.591,0.549 v1(-6.591,-1.46)
NetCON2_9: CON2.9 R7.1 U1.3 | length 88.7
  Top Layer w0.254: v1(-22.9,10.395) -22.727,10.222 -16.159,10.222 -14.849,11.532 -9.573,11.532 -8.093,10.053 -7.244,10.053 v1(-7.025,9.834) ; v1(-20.32,-8.484) -20.32,-16.815 -11.481,-25.654 -7.899,-25.654 -6.02,-27.534 -1.702,-27.534 -1.372,-27.203 -1.372,-26.391 -1.727,-26.035 -1.727,-22.927 -1,-22.2 CON2.9
  Bottom Layer w0.254: v1(-22.9,10.395) R7.1 -22.9,9.271 -20.041,9.271 -19.279,8.509 -19.279,-8.153 -19.609,-8.484 v1(-20.32,-8.484) ; U1.3 -7.025,3.693 -7.72,4.388 -8.76,4.388 -8.853,4.482 -8.853,8.006 v1(-7.025,9.834)
NetCON2_10: CON2.10 R8.1 U1.4 | length 77
  Top Layer w0.254: v1(-7.575,25.578) -9.658,23.495 -15.291,23.495 -17.297,21.488 -17.297,10.947 -17.113,10.763 -16.599,10.763 -15.376,11.986 -9.229,11.986 -7.767,10.524 -6.764,10.524 v1(-6.198,9.957) ; v1(-1.092,-6.198) -0.533,-5.639 v1(-0.533,0.254) ; v1(0.914,-17.994) 1,-18.08 CON2.10
  Bottom Layer w0.254: v1(-7.575,25.578) R8.1 ; v1(-6.198,9.957) -6.198,9.732 -8.399,7.53 -8.399,5.258 -8.077,4.936 -6.909,4.936 -6.525,4.552 U1.4 -6.525,1.391 -5.21,0.076 -4.42,0.076 -4.242,0.254 v1(-0.533,0.254) ; v1(-1.092,-6.198) -0.838,-6.198 0.711,-7.747 2.202,-7.747 2.608,-8.153 2.608,-11.64 0.914,-13.334 v1(0.914,-17.994)
NetCON2_11: CON2.11 U1.26 | length 40.4
  Top Layer w0.254: CON2.11 3,-18.923 v1(3.81,-18.923)
  Bottom Layer w0.254: U1.26 5.537,-3.5 6.736,-4.699 8.75,-4.699 12.4,-8.349 12.4,-10.79 9.122,-14.068 6.756,-14.068 6.202,-14.622 6.202,-19.859 3.099,-22.962 2.489,-22.962 2.184,-22.657 2.184,-21.334 3.81,-19.709 v1(3.81,-18.923)
NetCON4_2: CON4.2 U1.49 | length 34.9
  Top Layer w0.254: v1(-10.649,2.337) -9.76,1.448 -6.553,1.448 -5.486,0.381 -5.486,-2.141 -7.696,-4.35 v1(-7.696,-5.535)
  Bottom Layer w0.254: v1(-10.649,2.337) -11.589,3.277 -11.589,12.262 -10.759,13.092 -4.891,13.092 -3.81,14.173 CON4.2 ; U1.49 -8.661,-6.5 v1(-7.696,-5.535)
NetCON4_4: CON4.4 R12.2 | length 39.6
  Top Layer w0.254: v1(2.794,14.224) 3.837,14.224 7.245,10.816 7.245,9.792 9.152,7.885 9.152,3.599 10.338,2.413 v1(10.338,-0.711) ; v1(9.576,-15.164) 9.865,-14.875 R12.2
  Bottom Layer w0.254: CON4.4 1.27,15.037 2.388,15.037 2.794,14.63 v1(2.794,14.224) ; v1(9.576,-15.164) 9.745,-14.994 9.745,-14.178 12.9,-11.024 12.9,-8.207 9.347,-4.654 9.347,-1.702 v1(10.338,-0.711)
NetCON4_5: CON4.5 U2.18 | length 18.5
  Top Layer w0.254: U2.18 -10.415,9.195 v1(-9.387,9.195)
  Bottom Layer w0.254: v1(-9.387,9.195) -7.998,10.584 -4.063,10.584 -1.893,12.754 1.222,12.754 2.065,13.597 3.81,13.597 CON4.5
NetCON4_6: CON4.6 R27.1 U2.21 | length 32.6
  Top Layer w0.254: U2.21 -16.415,8.223 -13.767,10.871 v1(-10.49,10.871) ; v1(5.202,17.17) 6.085,17.17 v1(7.235,16.02)
  Bottom Layer w0.254: v1(-10.49,10.871) -9.195,12.167 -3.632,12.167 -2.108,13.691 -2.108,16.164 -1.6,16.672 4.703,16.672 v1(5.202,17.17) ; CON4.6 6.35,15.134 v1@7.235,15.986 ; v1(7.235,16.02) v1@7.235,15.986 ; R27.1 8.45,15.986 v1@7.235,15.986
NetCON4_7: CON4.7 R26.1 U2.22 | length 40.1
  Top Layer w0.254: U2.22 -18.415,6.883 -18.059,6.528 v1(-10.338,6.528)
  Bottom Layer w0.254: v1(-10.338,6.528) -11.135,7.325 -11.135,11.269 -9.766,12.638 -3.918,12.638 -2.75,13.806 -2.75,16.464 -2.088,17.126 1.891,17.126 2.765,18.001 5.74,18.001 CON4.7@6.35,18.745 ; CON4.7 CON4.7@6.35,18.745 ; R26.1 8.4,18.524 8.179,18.745 CON4.7@6.35,18.745
NetCON4_8: CON4.8 R50.2 U2.1 | length 85.5
  Top Layer w0.254: U2.1 -18.415,-6.528 -17.78,-5.893 -17.78,2.362 -16.815,3.327 -9.398,3.327 -8.407,4.318 -8.407,5.867 -7.874,6.401 -5.918,6.401 -5.283,7.036 v1(-5.283,21.209) ; v1(2.43,18.644) 2.43,17.502 10.744,9.189 v1(10.744,7.831) ; v1(4.699,20.244) 6.985,20.244 v1(8.636,21.895)
  Bottom Layer w0.254: v1(-5.283,21.209) -4.432,22.06 -1.333,22.06 -1.067,22.327 -1.067,23.419 -0.559,23.927 6.604,23.927 v1(8.636,21.895) ; v1(2.43,18.644) 3.81,18.644 CON4.8 4.131,19.676 v1(4.699,20.244) ; v1(10.744,7.831) 16.323,7.831 16.479,7.675 R50.2
NetCON4_9: CON4.9 U3.35 | length 37.4
  Top Layer w0.254: v1(5.326,19.236) 9.479,15.083 9.479,13.19 12.37,10.299 12.37,-3.327 11.32,-4.377 10.566,-4.377 10.244,-4.699 10.244,-5.631 10.625,-6.012 U3.35
  Bottom Layer w0.254: CON4.9 1.27,20.752 1.473,20.955 5.072,20.955 5.326,20.701 v1(5.326,19.236)
NetCON4_10: CON4.10 U3.34 | length 37.2
  Top Layer w0.254: v1(-0.254,20.701) -1.059,19.896 -1.059,17.856 1.566,15.231 3.511,15.231 7.699,11.043 7.699,10.127 9.606,8.22 9.606,6.438 9.801,6.243 9.801,3.687 11.125,2.362 v1(11.125,-1.067) ; v1(10.871,-5.004) 11.125,-5.258 U3.34
  Bottom Layer w0.254: CON4.10 -1.27,20.701 v1(-0.254,20.701) ; v1(10.871,-5.004) 9.994,-4.126 9.994,-2.198 v1(11.125,-1.067)
NetCON4_11: CON4.11 U1.46 | length 76.1
  Top Layer w0.254: v1(-11.818,-21.768) -19.253,-14.333 -19.253,3.546 -18.847,3.952 -10.83,3.952 -9.575,5.208 v1(-9.575,5.486) ; v1(-7.468,-21.768) -7.468,-10.606 v1(-6.68,-9.819) ; v1(-7.087,11.354) v1(-7.087,17.424)
  Bottom Layer w0.254: v1(-11.818,-21.768) v1(-7.468,-21.768) ; v1(-9.575,5.486) -9.575,7.975 -10.015,8.414 -10.015,9.83 -8.694,11.151 -7.29,11.151 v1(-7.087,11.354) ; v1(-7.087,17.424) -5.41,17.424 -3.81,19.025 CON4.11 ; U1.46 -7.025,-9.474 v1(-6.68,-9.819)
NetD1_1: D1.1 R1.2 | length 1.8
  Bottom Layer w0.254: D1.1 11.983,24.579 R1.2
NetD2_1: D2.1 R2.2 | length 2.8
  Bottom Layer w0.254: R2.2 23.655,9.88 D2.1
NetD3_1: D3.1 R3.2 | length 1.6
  Bottom Layer w0.254: R3.2 24.804,-11.758 D3.1
NetD4_1: D4.1 R4.2 | length 2.4
  Bottom Layer w0.254: R4.2 9.142,-26.657 D4.1
NetD5_1: D5.1 R5.2 | length 1.7
  Bottom Layer w0.254: D5.1 -9.376,-26.452 R5.2
NetD6_1: D6.1 R6.2 | length 2.2
  Bottom Layer w0.254: D6.1 -24.642,-11.931 R6.2
NetD7_1: D7.1 R7.2 | length 2.5
  Bottom Layer w0.254: D7.1 -25.591,9.625 R7.2
NetD8_1: D8.1 R8.2 | length 1.8
  Bottom Layer w0.254: D8.1 -9.317,26.482 R8.2
NetR9_1: R9.1 U1.60 | length 2.2
  Bottom Layer w0.254: R9.1 -11.049,-0.575 -10.624,-1 U1.60
NetR11_1: R11.1 U3.30 | length 5.3
  Top Layer w0.254: U3.30 13.868,-7.7 14.148,-7.421 14.148,-6.695 15.392,-5.45 R11.1
NetR25_1: R25.1 U2.16 | length 11.2
  Top Layer w0.254: v1(-13.287,9.973) -9.104,9.973 -8.628,9.497 -7.897,9.497 -7.311,8.911 -6.415,8.911 U2.16
  Bottom Layer w0.254: R25.1 -15.3,11.455 -14.77,11.455 v1(-13.287,9.973)
NetR26_2: R26.2 U1.43 | length 62.6
  Top Layer w0.254: v1(1.575,-11.278) 1.575,-9.754 2.642,-8.687 2.642,-8.021 4.361,-6.301 4.361,-4.416 3.996,-4.051 3.996,4.742 4.512,5.258 5.375,5.258 6.08,4.553 7.569,4.553 7.79,4.774 7.79,5.684 5.947,7.527 4.984,7.527 4.535,7.976 v1(3.327,7.976)
  Bottom Layer w0.254: U1.43 -5.525,-9.157 -5.74,-9.373 -5.74,-15.062 -4.753,-16.05 -0.632,-16.05 0.387,-15.031 0.387,-12.466 v1(1.575,-11.278) ; v1(3.327,7.976) 2.802,7.45 2.137,7.45 1.837,7.751 1.837,9.3 5.29,12.753 5.29,16.059 6.756,17.526 8.82,17.526 9.15,17.856 R26.2
NetR27_2: R27.2 U1.42 | length 41
  Top Layer w0.254: v1(1.245,-9.144) 2.159,-8.23 2.159,-3.175 2.634,-2.7 2.634,8.314 v1(2.464,8.484)
  Bottom Layer w0.254: U1.42 -5.025,-9.449 -5.283,-9.707 -5.283,-11.723 -4.703,-12.303 -1.914,-12.303 v1(1.245,-9.144) ; v1(2.464,8.484) 2.464,9.148 5.097,11.782 5.762,11.782 9.2,15.22 R27.2
NetR30_1: R30.1 U5.12 | length 11.3
  Bottom Layer w0.254: U5.12 14.2,14.316 14.395,14.511 17.453,14.511 17.543,14.421 17.543,12.979 18,12.522 19.99,12.522 21.818,14.35 R30.1
NetR31_1: R31.1 U5.14 | length 11.8
  Top Layer w0.254: v1(16.688,13.589) 17.135,13.142 v1(17.135,10.185)
  Bottom Layer w0.254: U5.14 16.062,12.65 16.688,13.276 v1(16.688,13.589) ; v1(17.135,10.185) 18.847,10.185 19.302,10.641 22.5,10.641 R31.1
NetR32_1: R32.1 U5.16 | length 9.6
  Top Layer w0.254: R32.1 17.526,6.9 17.78,7.154 17.78,9.104 18.542,9.866 v1(18.542,11.742)
  Bottom Layer w0.254: U5.16 15.342,11.65 15.342,11.348 16.788,11.348 17.182,11.742 v1(18.542,11.742)
NetR33_2: R33.2 U1.59 U8.6 | length 24.2
  Top Layer w0.254: v1(-13.562,-10.787) -12.479,-11.87 v1(-12.479,-14.45)
  Bottom Layer w0.254: R33.2 -18.45,-10.787 -14.775,-10.787 ; U8.6 v1(-12.479,-14.45) ; v1(-13.562,-10.787) -14.775,-10.787 ; U1.59 -13.641,-1.5 -13.978,-1.837 -13.978,-9.99 -14.775,-10.787
NetR34_2: R34.2 U1.58 U8.4 | length 23
  Top Layer w0.254: v1(-16.459,-11.532) -15.286,-12.705 v1(-15.286,-14.732)
  Bottom Layer w0.254: R34.2 -18.45,-11.532 v1(-16.459,-11.532) -14.31,-11.532 -14.191,-11.651 -13.13,-11.651 -12.751,-11.271 -12.751,-2.575 -12.176,-2 U1.58 ; v1(-15.286,-14.732) -14.6,-14.046 U8.4
NetR39_1: R39.1 U1.8 U5.7 | length 70
  Top Layer w0.254: v1(-8.661,2.743) -5.639,2.743 v1(-4.394,1.499) ; v1(10.82,12.776) 11.523,13.479 11.523,17.797 11.989,18.263 14.834,18.263 15.24,17.856 15.24,16.231 14.486,15.477 13.462,15.477 13.165,15.773 13.165,16.731 13.325,16.731 R39.1 v1(12.624,16.775)
  Bottom Layer w0.254: v1(-8.661,2.743) -9.695,1.71 -10.973,1.71 -12.043,2.78 -12.043,13.136 -11.633,13.546 -5.54,13.546 -5.237,13.849 -5.237,15.442 -3.099,17.58 -0.044,17.58 0.432,18.056 0.432,20.955 0.888,21.411 6.936,21.411 9.787,18.559 10.839,18.559 v1(12.624,16.775) ; U1.8 -4.525,1.629 v1(-4.394,1.499) ; v1(10.82,12.776) 10.82,12.65 U5.7
NetR40_1: R40.1 U1.10 U5.9 | length 32.3
  Top Layer w0.254: v1(13.792,16.104) 13.835,16.146 14.14,16.146 14.427,16.434 14.427,16.8 R40.1
  Bottom Layer w0.254: U1.10 -3.525,7.956 -2.997,8.484 0.392,8.484 2.291,6.584 4.337,6.584 4.848,7.095 4.848,8.81 10.008,13.97 U5.9@12.7,13.97 ; U5.9 U5.9@12.7,13.97 ; v1(13.792,16.104) 13.749,16.146 12.04,16.146 11.76,15.867 11.76,15.164 12.04,14.884 12.268,14.884 12.7,14.453 U5.9@12.7,13.97
NetR45_1: R45.1 U5.1 | length 5.9
  Bottom Layer w0.254: U5.1 14.2,9.644 14.37,9.474 R45.1
NetR46_1: R46.1 U1.14 | length 17.9
  Top Layer w0.254: v1(5.013,4.445) 5.013,3.394 10.132,-1.725 R46.1
  Bottom Layer w0.254: U1.14 -1.525,4.039 -1.119,4.445 v1(5.013,4.445)
NetR46_2: R46.2 U3.11 | length 22.7
  Top Layer w0.254: U3.11 7.932,-13.629 4.494,-13.629 3.266,-12.4 3.266,-9.958 3.762,-9.461 3.762,-8.415 5.269,-6.909 5.269,-3.141 5.935,-2.475 R46.2
NetR47_1: R47.1 R48.1 U1.15 | length 15.1
  Bottom Layer w0.254: U1.15 -1.025,3.712 -0.762,3.975 3.823,3.975 4.229,3.568 5.077,3.568 6.517,5.008 6.517,5.603 9.05,8.136 R48.1 9.627,8.5 9.652,8.525 R47.1
NetR50_1: R50.1 U1.29 | length 28.5
  Top Layer w0.254: v1(3.542,-5.131) 3.542,5.579 4.318,6.355 5.988,6.355 v1(7.163,5.18)
  Bottom Layer w0.254: U1.29 3.411,-5 v1(3.542,-5.131) ; v1(7.163,5.18) 8.866,6.883 11.43,6.883 11.924,7.377 15.799,7.377 16.251,6.925 R50.1
NetU1_9: U1.9 U5.4 | length 24
  Top Layer w0.254: v1(-4.293,4.039) -1.041,4.039 -0.103,4.977 v1(-0.103,6.818)
  Bottom Layer w0.254: v1(-4.293,4.039) -4.025,3.771 U1.9 ; v1(-0.103,6.818) 1.039,5.676 5.197,5.676 6.741,7.22 6.741,7.933 8.098,9.29 8.928,9.29 9.555,9.917 12.329,9.917 12.7,10.288 U5.4
NetU1_11: U1.11 U5.6 | length 23.3
  Bottom Layer w0.254: U1.11 -3.025,6.957 -2.184,7.798 0.333,7.798 2.001,6.13 4.743,6.13 6.287,7.674 6.287,8.278 8.055,10.046 8.055,10.491 8.538,10.974 9.229,10.974 10.36,12.104 11.409,12.104 11.455,12.15 U5.6
NetU1_16: U1.16 U3.17 | length 35.9
  Top Layer w0.254: v1(4.724,2.616) 4.724,-3.959 4.815,-4.05 4.815,-6.54 3.16,-8.195 3.16,-9.381 2.812,-9.73 2.812,-12.78 5.344,-15.313 v1(7.569,-15.313) ; U3.17 11.125,-13.894 11.404,-14.173 v1(11.913,-14.173)
  Bottom Layer w0.254: U1.16 -0.525,3.099 4.242,3.099 v1(4.724,2.616) ; v1(7.569,-15.313) 8.501,-16.245 10.82,-16.245 11.913,-15.153 v1(11.913,-14.173)
NetU1_17: U1.17 U3.16 | length 29.4
  Top Layer w0.254: v1(2.007,1.499) 1.592,1.084 1.592,-7.395 0.442,-8.545 0.442,-11.391 4.99,-15.94 7.976,-15.94 8.196,-15.719 8.196,-14.048 8.554,-13.691 10.414,-13.691 10.625,-13.48 U3.16
  Bottom Layer w0.254: U1.17 2.007,1 v1(2.007,1.499)
NetU1_24: U1.24 U5.5 | length 25.6
  Top Layer w0.254: v1(8.732,10.155) 10.06,8.828 10.06,6.798 10.566,6.292 v1(10.566,5.334)
  Bottom Layer w0.254: U1.24 5.517,-2.5 10.901,2.883 11.633,2.883 12.082,3.333 12.082,4.369 11.117,5.334 v1(10.566,5.334) ; v1(8.732,10.155) 9.097,10.52 10.168,10.52 11.298,11.65 U5.5
NetU1_25: U1.25 U5.15 | length 26.6
  Top Layer w0.254: v1(13.513,2.235) 13.513,7.366 16.05,9.903 16.05,12.068 15.957,11.975 v1@16.025,11.975
  Bottom Layer w0.254: U1.25 6.091,-3 9.96,0.869 12.147,0.869 v1(13.513,2.235) ; U5.15 15.782,12.15 15.957,11.975 v1@16.025,11.975
  other v1: 16.05,12
NetU1_28: U1.28 U3.8 | length 14.1
  Top Layer w0.254: v1(6.325,-12.141) 6.325,-11.328 6.453,-11.2 U3.8
  Bottom Layer w0.254: U1.28 3.912,-4.5 4.361,-4.949 4.361,-5.461 7.406,-8.506 7.406,-11.06 v1(6.325,-12.141)
NetU1_30: U1.30 U2.3 | length 40.5
  Top Layer w0.254: U2.3 -14.415,-8.861 -11.852,-11.423 -11.852,-15.408 -12.421,-15.977 -12.421,-17.628 v1(-11.242,-18.806)
  Bottom Layer w0.254: v1(-11.242,-18.806) 1.067,-18.806 1.541,-18.331 1.541,-13.883 3.096,-12.329 3.096,-6.842 2.742,-6.488 2.742,-5.956 2.286,-5.5 U1.30
NetU1_33: U1.33 U2.9 | length 8.4
  Top Layer w0.254: v1(-2.59,-9.55) -2.59,-4.962 U2.9
  Bottom Layer w0.254: v1(-2.59,-9.55) -2.064,-10.076 -1.338,-10.076 -0.525,-9.262 U1.33
NetU1_34: U1.34 U2.14 | length 23
  Top Layer w0.254: U2.14 -1.363,5.038 -0.77,5.631 -0.77,7.426 0.254,8.45 0.465,8.45 0.533,8.382 0.533,4.851 0.094,4.412 0.094,-5.991 -0.926,-7.01 v1(-1.143,-7.01)
  Bottom Layer w0.254: v1(-1.143,-7.01) -1.025,-7.128 U1.34
NetU1_35: U1.35 U2.10 | length 11.4
  Top Layer w0.254: U2.10 -3.2,-2.962 -3.505,-3.267 -3.505,-9.757 -3.044,-10.219 -2.262,-10.219 -1.651,-9.607 v1(-1.651,-9.449)
  Bottom Layer w0.254: v1(-1.651,-9.449) -1.525,-9.323 U1.35
NetU1_36: U1.36 U2.13 | length 12.7
  Top Layer w0.254: U2.13 -1.437,3.038 -1.218,2.819 -1.218,-5.425 -1.956,-6.163 v1(-1.956,-7.036)
  Bottom Layer w0.254: U1.36 -2.025,-7.105 v1(-1.956,-7.036)
NetU1_55: U1.55 U3.7 | length 52.7
  Top Layer w0.254: v1(-11.989,-4.293) -12.621,-4.293 -15.265,-6.937 -15.265,-9.314 -14.191,-10.389 -14.191,-11.651 -13.792,-12.049 -13.792,-17.475 v1(-11.684,-19.583) ; v1(5.207,-9.271) 5.207,-9.5 4.174,-10.534 4.174,-11.405 4.402,-11.633 5.235,-11.633 6.168,-10.7 U3.7
  Bottom Layer w0.254: v1(-11.989,-4.293) -11.196,-3.5 U1.55 ; v1(-11.684,-19.583) 1.672,-19.583 1.995,-19.26 1.995,-15.114 3.64,-13.469 3.64,-10.432 4.801,-9.271 v1(5.207,-9.271)
NetU1_56: U1.56 U3.6 | length 31.4
  Top Layer w0.254: v1(-6.271,-5.733) -5.279,-6.725 -5.279,-8.641 -5.729,-9.091 -5.729,-12.127 -3.658,-14.199 -0.122,-14.199 2.127,-16.447 v1(3.136,-16.447) ; v1(4.801,-10.948) 5.548,-10.2 U3.6
  Bottom Layer w0.254: U1.56 -9.004,-3 v1(-6.271,-5.733) ; v1(3.136,-16.447) 4.801,-14.783 v1(4.801,-10.948)
NetU1_57: U1.57 U3.5 | length 60.8
  Top Layer w0.254: v1(-11.43,-17.475) -11.398,-17.444 -11.398,-10.852 -13.284,-8.966 -13.284,-5.766 -12.616,-5.097 -9.085,-5.097 -5.944,-1.956 -5.944,-1.041 -6.166,-0.819 -8.135,-0.819 v1(-8.534,-1.219) ; v1(6.325,-9.271) 6.754,-9.7 U3.5
  Bottom Layer w0.254: v1(-11.43,-17.475) -12.657,-18.703 -12.657,-20.752 -12.298,-21.111 0.93,-21.111 2.449,-19.591 2.449,-15.744 4.094,-14.099 4.094,-10.671 4.461,-10.304 5.291,-10.304 v1(6.325,-9.271) ; U1.57 -8.977,-2.5 -8.61,-2.133 -8.61,-1.295 v1(-8.534,-1.219)
NetU1_61: U1.61 U8.8 | length 23.2
  Top Layer w0.254: v1(-13.106,-15.443) v1(-13.106,-12.522)
  Bottom Layer w0.254: U8.8 -13.113,-15.45 v1(-13.106,-15.443) ; v1(-13.106,-12.522) -12.624,-12.522 -11.862,-11.76 -11.862,-10.338 -8.484,-6.96 -7.849,-6.96 -7.544,-6.655 -5.918,-6.655 -5.436,-6.172 -5.436,-4.953 -7.899,-2.489 -7.899,-0.94 -8.339,-0.5 U1.61
NetU1_62: U1.62 U8.7 | length 22.5
  Top Layer w0.254: v1(-15.418,-10.16) -15.418,-11.735 -14.478,-12.675 v1(-14.478,-14.95) ; v1(-14.605,-3.708) -10.77,0.127 v1(-8.077,0.127)
  Bottom Layer w0.254: v1(-15.418,-10.16) -15.28,-10.022 -15.28,-4.383 v1(-14.605,-3.708) ; v1(-14.478,-14.95) U8.7 ; U1.62 -8.204,0 v1(-8.077,0.127)
NetU3_25: U3.25 U4.4 | length 4.2
  Top Layer w0.254: U3.25 16.7,-10.2 16.9,-10 U4.4@16.9,-9.425
NetU3_26: U3.26 U4.3 | length 4.7
  Top Layer w0.254: U3.26 15.404,-9.7 16.9,-8.204 U4.3@16.9,-7.625
pads on no net: A1.2 U1.37 U1.38 U1.44 U1.45 U1.50 U1.54 U2.2 U2.4 U2.5 U2.6 U2.7 U2.11 U2.12 U2.17 U2.19 U2.20 U3.2 U3.3 U3.4 U3.9 U3.12 U3.13 U3.14 U3.15 U3.18 U3.19 U3.36 U3.37 U3.38 U5. U8.2 U8.3 U8.9 U8.11

## Other copper
Top Layer:
  region net GND: 19.3,-8.95 18.375,-8.95 18.375,-9.95 19.3,-9.95
  region net NetA1_1: 26.125,-6.075 24.95,-6.075 24.95,-6.825 26.125,-6.825
  region net NetA1_1: 26.3,-6.075 26.3,-6.075 26.3,-6.825 26.3,-6.825
  region net NetA1_1: 26.125,-6.825 18.025,-6.825 18.025,-7.625 26.125,-7.625
  rectangle net GND: 21.336,7.62 27.432,8.128
  rectangle net GND: 18.175,-6.15 21.336,8.128
  region net GND: 26.85,-8.475 19.3,-8.475 19.3,-9.95 26.85,-9.95

## Silkscreen, mask and mechanical layers (free items; w line width, h text height)
Mechanical 1:
  circle w0.2: c0,0 r28.7